# Altium PCB NBP5 Actel ProASIC Plus PQ208 Rev1.01.PcbDoc (part 2 of 2)
Units mm, origin at the board's own origin, x right, y up, seen from the top; angles counter-clockwise.
Board outline 69 x 80.99 mm, 2 copper layers (Top Layer, Bottom Layer); 65 components, 193 nets, 558 pads, 171 vias.
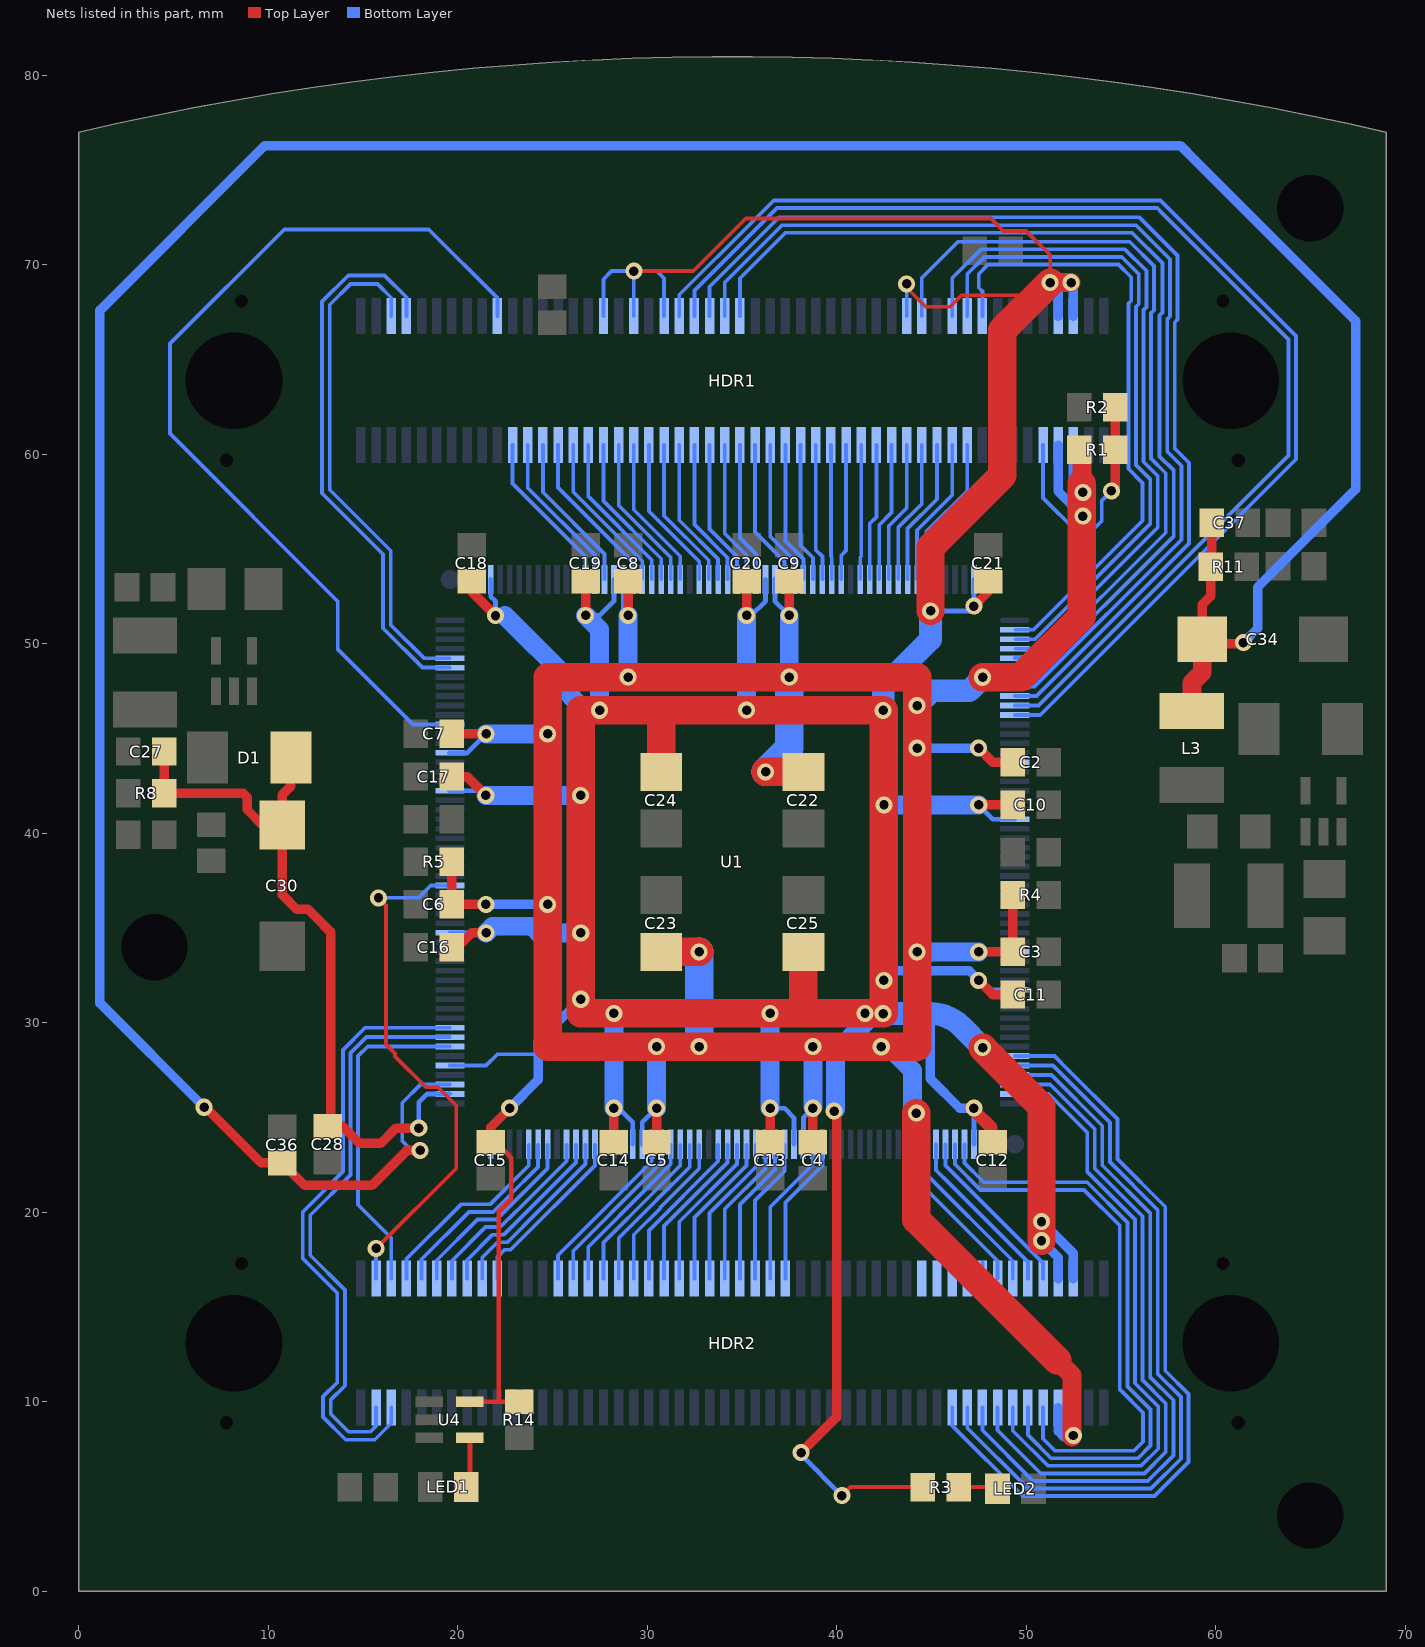
[diagram p2: the nets of this part, all layers, seen from the top]

## Via types
v1: diameter 0.9, hole 0.5, Top Layer to Bottom Layer, tented bottom, 171 vias

## Nets (pads, with @x,y where several pads share a name; then routed paths per layer and width w, separated by ;. In a path a pad name is that pad's centre, name@x,y a point inside that pad or via, vN(x,y) a via of type N, cw(c..) or ccw(c..) an arc to the next point about the centre after c; other vN are vias at no path point) (continued)
NetLED1_2: LED1.2 U4.4 | length 2.7
  Top Layer w0.25: LED1.2@20.457,5.512 20.65,5.705 U4.4@20.65,8.1
NetLED2_1: LED2.1 R3.2 | length 2.1
  Top Layer w0.2: R3.2@46.45,5.503 48.398,5.503 LED2.1@48.492,5.408
NEXUS_TCK: HDR1.82 U1.3 | length 35.2
  Bottom Layer w0.2: HDR1.82@46.9,67.3 46.9,69.525 47.8,70.425 55.05,70.425 55.95,69.525 55.95,67.947 55.8,67.797 55.8,59.45 56.55,58.7 56.55,56.325 50.475,50.25 U1.3@49.425,50.25
NEXUS_TDI: HDR1.84 U1.2 | length 34.1
  Bottom Layer w0.2: HDR1.84@47.7,68.2 HDR1.84@47.7,67.3 47.7,68.6 47.5,68.8 47.5,69.525 48,70.025 54.875,70.025 55.55,69.35 55.55,68.113 55.4,67.963 55.4,59.25 56.15,58.5 56.15,56.5 50.4,50.75 U1.2@49.425,50.75
NEXUS_TDO: HDR1.76 U1.5 | length 40.8
  Bottom Layer w0.2: HDR1.76@44.5,67.3 44.5,69.325 46.4,71.225 55.475,71.225 56.75,69.95 56.75,67.616 56.6,67.466 56.6,59.781 57.371,59.01 57.371,55.871 50.751,49.251 U1.5@49.4,49.251
NEXUS_TMS: HDR1.80 U1.4 | length 37.4
  Bottom Layer w0.2: HDR1.80@46.1,67.3 46.1,69.3 47.625,70.825 55.225,70.825 56.35,69.7 56.35,67.781 56.2,67.631 56.2,59.616 56.95,58.866 56.95,56.15 50.55,49.75 U1.4@49.425,49.75
RAM0_DATA0: HDR2.42 U1.79 | length 8.5
  Bottom Layer w0.2: HDR2.42@30.9,16.5 30.9,19.275 34.25,22.625 U1.79@34.25,23.575
RAM0_DATA1: HDR2.40 U1.80 | length 8.6
  Bottom Layer w0.2: HDR2.40@30.1,16.5 30.1,19.05 33.75,22.7 U1.80@33.75,23.575
RAM0_DATA2: HDR2.38 U1.82 | length 8.5
  Bottom Layer w0.2: HDR2.38@29.3,16.5 29.3,18.816 30.7,20.216 30.7,20.275 32.75,22.325 U1.82@32.75,23.575
RAM0_DATA3: HDR2.36 U1.83 | length 8.6
  Bottom Layer w0.2: HDR2.36@28.5,16.5 28.5,18.641 30.525,20.666 30.525,20.675 32.25,22.4 U1.83@32.25,23.575
RAM0_DATA4: HDR2.34 U1.84 | length 8.8
  Bottom Layer w0.2: HDR2.34@27.7,16.5 27.7,18.416 30.35,21.066 30.35,21.075 31.75,22.475 U1.84@31.75,23.575
RAM0_DATA5: HDR2.32 U1.85 | length 8.9
  Bottom Layer w0.2: HDR2.32@26.9,16.5 26.9,18.191 30.175,21.466 30.175,21.475 31.25,22.55 U1.85@31.25,23.575
RAM0_DATA6: HDR2.30 U1.86 | length 9
  Bottom Layer w0.2: HDR2.30@26.1,16.5 26.1,17.966 30,21.866 30,21.875 30.75,22.625 U1.86@30.75,23.575
RAM0_DATA7: HDR2.28 U1.87 | length 9.1
  Bottom Layer w0.2: HDR2.28@25.3,16.5 25.3,17.741 29.825,22.266 29.825,22.275 30.25,22.7 U1.87@30.25,23.575
RAM0_OE: HDR1.41 U1.180 | length 8
  Bottom Layer w0.2: HDR1.41@30.9,60.5 30.9,56.766 33.25,54.416 U1.180@33.25,53.425
RAM0_WE: HDR1.79 U1.202 | length 7.8
  Bottom Layer w0.2: U1.202@44.25,53.425 44.25,56 46.1,57.85 HDR1.79@46.1,60.5
RAM1_DATA0: HDR1.45 U1.182 | length 7.8
  Bottom Layer w0.2: HDR1.45@32.5,60.5 32.5,56.297 34.25,54.547 U1.182@34.25,53.425
RAM1_DATA1: HDR1.49 U1.184 | length 7.6
  Bottom Layer w0.2: HDR1.49@34.1,60.5 34.1,55.828 35.25,54.678 U1.184@35.25,53.425
RAM1_DATA2: HDR1.53 U1.188 | length 7.7
  Bottom Layer w0.2: HDR1.53@35.7,60.5 35.7,55.9 37.25,54.35 U1.188@37.25,53.425
RAM1_DATA3: HDR1.57 U1.190 | length 7.5
  Bottom Layer w0.2: HDR1.57@37.3,60.5 37.3,55.431 38.25,54.481 U1.190@38.25,53.425
RAM1_DATA4: HDR1.55 U1.189 | length 7.6
  Bottom Layer w0.2: HDR1.55@36.5,60.5 36.5,55.666 37.75,54.416 U1.189@37.75,53.425
RAM1_DATA5: HDR1.51 U1.185 | length 7.4
  Bottom Layer w0.2: HDR1.51@34.9,60.5 34.9,55.594 35.75,54.744 U1.185@35.75,53.425
RAM1_DATA6: HDR1.47 U1.183 | length 7.7
  Bottom Layer w0.2: HDR1.47@33.3,60.5 33.3,56.063 34.75,54.613 U1.183@34.75,53.425
RAM1_DATA7: HDR1.43 U1.181 | length 7.9
  Bottom Layer w0.2: HDR1.43@31.7,60.5 31.7,56.531 33.75,54.481 U1.181@33.75,53.425
RAM1_OE: HDR1.39 U1.179 | length 8.2
  Bottom Layer w0.2: HDR1.39@30.1,60.5 30.1,57 32.75,54.35 U1.179@32.75,53.425
RAM1_WE: HDR1.61 U1.192 | length 7.2
  Bottom Layer w0.2: HDR1.61@38.9,60.5 38.9,54.963 39.25,54.613 U1.192@39.25,53.425
RAM_ADDR0: HDR1.21 U1.167 | length 8.7
  Bottom Layer w0.2: HDR1.21@22.9,60.5 22.9,58.472 26.75,54.622 U1.167@26.75,53.425
RAM_ADDR1: HDR1.25 U1.169 | length 8.4
  Bottom Layer w0.2: HDR1.25@24.5,60.5 24.5,58.003 27.75,54.753 U1.169@27.75,53.425
RAM_ADDR2: HDR1.29 U1.173 | length 8.6
  Bottom Layer w0.2: HDR1.29@26.1,60.5 26.1,58.016 29.75,54.366 U1.173@29.75,53.425
RAM_ADDR3: HDR1.33 U1.175 | length 8.3
  Bottom Layer w0.2: HDR1.33@27.7,60.5 27.7,57.547 30.75,54.497 U1.175@30.75,53.425
RAM_ADDR4: HDR1.65 U1.194 | length 7.2
  Bottom Layer w0.2: U1.194@40.25,53.425 40.25,54.675 40.5,54.925 HDR1.65@40.5,60.5
RAM_ADDR5: HDR1.69 U1.197 | length 7.2
  Bottom Layer w0.2: U1.197@41.75,53.425 41.75,56.35 42.1,56.7 HDR1.69@42.1,60.5
RAM_ADDR6: HDR1.73 U1.199 | length 7.5
  Bottom Layer w0.2: U1.199@42.75,53.425 42.75,56.219 43.7,57.169 HDR1.73@43.7,60.5
RAM_ADDR7: HDR1.77 U1.201 | length 7.7
  Bottom Layer w0.2: U1.201@43.75,53.425 43.75,56.087 45.3,57.637 HDR1.77@45.3,60.5
RAM_ADDR8: HDR1.75 U1.200 | length 7.6
  Bottom Layer w0.2: U1.200@43.25,53.425 43.25,56.153 44.5,57.403 HDR1.75@44.5,60.5
RAM_ADDR9: HDR1.71 U1.198 | length 7.3
  Bottom Layer w0.2: U1.198@42.25,53.425 42.25,56.284 42.9,56.934 HDR1.71@42.9,60.5
RAM_ADDR10: HDR1.67 U1.196 | length 7.1
  Bottom Layer w0.2: U1.196@41.25,53.425 41.25,54.575 41.3,54.625 HDR1.67@41.3,60.5
RAM_ADDR11: HDR1.63 U1.193 | length 7.1
  Bottom Layer w0.2: HDR1.63@39.7,60.5 39.7,54.625 39.75,54.575 U1.193@39.75,53.425
RAM_ADDR12: HDR1.59 U1.191 | length 7.3
  Bottom Layer w0.2: HDR1.59@38.1,60.5 38.1,55.197 38.75,54.547 U1.191@38.75,53.425
RAM_ADDR13: HDR1.35 U1.176 | length 8.2
  Bottom Layer w0.2: HDR1.35@28.5,60.5 28.5,57.313 31.25,54.563 U1.176@31.25,53.425
RAM_ADDR14: HDR1.31 U1.174 | length 8.5
  Bottom Layer w0.2: HDR1.31@26.9,60.5 26.9,57.781 30.25,54.431 U1.174@30.25,53.425
RAM_ADDR15: HDR1.27 U1.172 | length 8.7
  Bottom Layer w0.2: HDR1.27@25.3,60.5 25.3,58.25 29.25,54.3 U1.172@29.25,53.425
RAM_ADDR16: HDR1.23 U1.168 | length 8.5
  Bottom Layer w0.2: HDR1.23@23.7,60.5 23.7,58.238 27.25,54.688 U1.168@27.25,53.425
RAM_CS: HDR1.37 U1.177 | length 8.1
  Bottom Layer w0.2: HDR1.37@29.3,60.5 29.3,57.078 31.75,54.628 U1.177@31.75,53.425
RED0: HDR1.6 U1.152 | length 27
  Bottom Layer w0.2: HDR1.6@16.5,67.3 16.5,68.275 15.775,69 14.35,69 13.25,67.9 13.25,58.134 16.469,54.915 16.469,51.006 18.225,49.25 U1.152@19.575,49.25
RED1: HDR1.8 U1.151 | length 29.4
  Bottom Layer w0.2: HDR1.8@17.3,67.3 17.3,68.3 16.15,69.45 14.225,69.45 12.85,68.075 12.85,57.95 16.069,54.731 16.069,50.831 18.15,48.75 U1.151@19.575,48.75
REF_CLK: HDR2.4 U1.128 | length 27.9
  Top Layer w0.2: v1(15.7,18.1) 19.925,22.325 19.925,25.634 18.959,26.6 18.325,26.6 16.7,28.225 16.7,28.391 16.225,28.866 16.225,36.2 v1(15.825,36.6)
  Bottom Layer w0.2: HDR2.4@15.7,16.5 v1(15.7,18.1) ; v1(15.825,36.6) 17.934,36.6 18.584,37.25 U1.128@19.575,37.25
SCL: HDR2.5 U1.113 | length 32.7
  Bottom Layer w0.2: HDR2.5@16.5,9.7 16.5,8.875 15.625,8 14.1,8 12.9,9.2 12.9,10.275 13.65,11.025 13.65,15.744 11.825,17.569 11.825,20.025 13.95,22.15 13.95,28.577 15.123,29.75 U1.113@19.575,29.75
SDA: HDR2.3 U1.112 | length 30.4
  Bottom Layer w0.2: HDR2.3@15.7,9.7 15.7,8.725 15.402,8.427 14.248,8.427 13.3,9.375 13.3,10.1 14.05,10.85 14.05,15.91 12.225,17.735 12.225,19.85 14.35,21.975 14.35,28.412 15.188,29.25 U1.112@19.575,29.25
SP0: HDR2.79 U1.47 | length 42.2
  Bottom Layer w0.2: HDR2.79@46.1,9.7 46.1,8.75 49.825,5.025 56.775,5.025 58.575,6.825 58.575,10.419 57.35,11.644 57.35,20.294 54.825,22.819 54.825,24.925 52.246,27.504 51.499,28.251 U1.47@49.4,28.251
SP1: HDR2.81 U1.48 | length 39.9
  Bottom Layer w0.2: HDR2.81@46.9,9.7 46.9,8.625 50.1,5.425 56.6,5.425 58.175,7 58.175,10.253 56.95,11.478 56.95,20.128 54.425,22.653 54.425,24.75 51.424,27.751 U1.48@49.4,27.751
SP2: HDR2.83 U1.49 | length 37.6
  Bottom Layer w0.2: HDR2.83@47.7,9.7 47.7,8.5 50.375,5.825 56.425,5.825 57.775,7.175 57.775,10.088 56.55,11.313 56.55,19.962 54.025,22.487 54.025,24.575 51.349,27.251 U1.49@49.4,27.251
SP3: HDR2.85 U1.50 | length 35.3
  Bottom Layer w0.2: HDR2.85@48.5,9.7 48.5,8.5 50.775,6.225 56.25,6.225 57.375,7.35 57.375,9.922 56.15,11.147 56.15,19.797 53.625,22.322 53.625,24.4 51.274,26.751 U1.50@49.4,26.751
SP4: HDR2.87 U1.51 | length 33
  Bottom Layer w0.2: HDR2.87@49.3,9.7 49.3,8.475 51.15,6.625 56.075,6.625 56.975,7.525 56.975,9.756 55.75,10.981 55.75,19.631 53.225,22.156 53.225,24.225 51.199,26.251 U1.51@49.4,26.251
SP5: HDR2.89 U1.54 | length 31.9
  Bottom Layer w0.2: U1.54@46.75,23.601 46.75,22.607 47.769,21.588 53.227,21.588 55.35,19.465 55.35,10.816 56.575,9.591 56.575,7.7 55.9,7.025 51.325,7.025 50.1,8.25 HDR2.89@50.1,9.7
SP6: HDR2.91 U1.55 | length 30.4
  Bottom Layer w0.2: U1.55@46.25,23.601 46.25,22.541 47.603,21.188 53.062,21.188 54.95,19.3 54.95,10.65 56.175,9.425 56.175,7.9 55.7,7.425 51.525,7.425 50.9,8.05 HDR2.91@50.9,9.7
SP7: HDR2.92 U1.56 | length 9.2
  Bottom Layer w0.2: U1.56@45.75,23.601 45.75,22.475 50.9,17.325 HDR2.92@50.9,16.5
SP8: HDR2.90 U1.57 | length 9.4
  Bottom Layer w0.2: U1.57@45.25,23.601 45.25,22.225 45.985,21.49 ; 45.75,21.725 45.985,21.49 ; HDR2.90@50.1,16.5 50.1,17.375 45.985,21.49
SP9: HDR2.88 U1.58 | length 9
  Bottom Layer w0.2: U1.58@44.75,23.601 44.75,22 49.3,17.45 HDR2.88@49.3,16.5
SP10: HDR2.86 U1.59 | length 8.9
  Bottom Layer w0.2: U1.59@44.25,23.601 44.25,21.7 48.5,17.45 HDR2.86@48.5,16.5
SP11: HDR2.84 | length 0.8
  Bottom Layer w0.2: HDR2.84@47.7,16.5 HDR2.84@47.7,17.341
SP12: HDR2.82
SP13: HDR2.80
SP14: HDR2.78
SP15: HDR2.76
SPI_CLK: HDR1.46 U1.10 | length 63.4
  Bottom Layer w0.2: HDR1.46@32.5,67.3 32.5,68.65 36.277,72.427 36.85,73 56.925,73 57.173,72.752 63.85,66.075 63.85,59.95 50.651,46.751 U1.10@49.4,46.751
SPI_DIN: HDR1.44 U1.11 | length 66.3
  Bottom Layer w0.2: HDR1.44@31.7,67.3 31.7,68.425 35.6,72.325 ; 35.134,71.859 35.143,71.859 36.684,73.4 57.1,73.4 64.25,66.25 64.25,59.75 50.751,46.251 U1.11@49.4,46.251
SPI_DOUT: HDR1.50 U1.8 | length 54.5
  Bottom Layer w0.2: HDR1.50@34.1,67.3 34.1,69.075 36.815,71.79 37.125,72.1 55.8,72.1 57.6,70.3 57.6,67.291 57.459,67.15 ; U1.8@49.4,47.751 50.451,47.751 58.2,55.5 58.2,59.4 57.45,60.15 57.45,67.15 57.455,67.155
SPI_MODE: HDR1.52 U1.7 | length 52.2
  Bottom Layer w0.2: HDR1.52@34.9,67.3 34.9,69.3 37.3,71.7 55.6,71.7 57.2,70.1 57.2,67.5 57.05,67.35 57.05,59.897 57.8,59.147 57.8,55.7 50.351,48.251 U1.7@49.4,48.251
SPI_SEL: HDR1.48 U1.9 | length 56.7
  Bottom Layer w0.2: HDR1.48@33.3,67.3 33.3,68.85 36.677,72.227 36.964,72.514 55.986,72.514 58,70.5 58,67.125 57.85,66.975 57.85,60.316 58.6,59.566 58.6,55.3 50.551,47.251 U1.9@49.4,47.251
SW0: HDR2.44 U1.78 | length 8.3
  Bottom Layer w0.2: HDR2.44@31.7,16.5 31.7,19.509 34.75,22.559 U1.78@34.75,23.575
SW1: HDR2.46 U1.77 | length 8.2
  Bottom Layer w0.2: HDR2.46@32.5,16.5 32.5,19.725 35.25,22.475 U1.77@35.25,23.575
SW2: HDR2.48 U1.76 | length 8.1
  Bottom Layer w0.2: HDR2.48@33.3,16.5 33.3,19.959 35.75,22.409 U1.76@35.75,23.575
SW3: HDR2.50 U1.75 | length 8
  Bottom Layer w0.2: HDR2.50@34.1,16.5 34.1,20.175 36.25,22.325 U1.75@36.25,23.575
SW4: HDR2.52 U1.74 | length 7.8
  Bottom Layer w0.2: HDR2.52@34.9,16.5 34.9,20.409 36.75,22.259 U1.74@36.75,23.575
SW5: HDR2.54 U1.73 | length 7.7
  Bottom Layer w0.2: HDR2.54@35.7,16.5 35.7,20.625 37.25,22.175 U1.73@37.25,23.575
SW6: HDR2.56 U1.70 | length 8
  Bottom Layer w0.2: HDR2.56@36.5,16.5 36.5,20.291 38.75,22.54 U1.70@38.75,23.601
SW7: HDR2.58 U1.69 | length 7.9
  Bottom Layer w0.2: HDR2.58@37.3,16.5 37.3,20.525 39.25,22.475 U1.69@39.25,23.575
SWC0: HDR2.18 U1.94 | length 9.6
  Bottom Layer w0.2: HDR2.18@21.3,16.5 21.3,17.625 22.1,18.425 22.634,18.425 23.475,19.266 23.475,19.275 26.75,22.55 U1.94@26.75,23.575
SWC1: HDR2.16 U1.95 | length 9.8
  Bottom Layer w0.2: HDR2.16@20.5,16.5 20.5,17.475 21.85,18.825 22.4,18.825 22.42,18.845 ; 22.441,18.825 23.525,19.909 23.534,19.909 26.25,22.625 U1.95@26.25,23.575
SWC2: HDR2.14 U1.96 | length 10
  Bottom Layer w0.2: HDR2.14@19.7,16.5 19.7,17.45 21.475,19.225 22.25,19.225 23.1,20.075 23.125,20.075 25.75,22.7 U1.96@25.75,23.575
SWC3: HDR2.6 U1.111 | length 17.5
  Bottom Layer w0.2: HDR2.6@16.5,16.5 16.5,18.65 14.75,20.4 14.75,28.246 15.254,28.75 U1.111@19.575,28.75
SWR0: HDR2.20 U1.93 | length 9.4
  Bottom Layer w0.2: HDR2.20@22.1,16.5 22.1,17.65 22.475,18.025 22.8,18.025 27.25,22.475 U1.93@27.25,23.575
SWR1: HDR2.12 U1.98 | length 10.1
  Bottom Layer w0.2: HDR2.12@18.9,16.5 18.9,17.475 21.05,19.625 22.05,19.625 22.9,20.475 24.75,22.325 U1.98@24.75,23.575
SWR2: HDR2.10 U1.99 | length 10.4
  Bottom Layer w0.2: HDR2.10@18.1,16.5 18.1,17.525 20.6,20.025 21.884,20.025 22.725,20.866 22.725,20.875 24.25,22.4 U1.99@24.25,23.575
SWR3: HDR2.8 U1.100 | length 10.6
  Bottom Layer w0.2: HDR2.8@17.3,16.5 17.3,17.55 20.175,20.425 21.709,20.425 22.55,21.266 22.55,21.275 23.75,22.475 U1.100@23.75,23.575
TEST: HDR1.81 U1.203 | length 8
  Bottom Layer w0.2: U1.203@44.75,53.425 44.75,55.934 46.9,58.084 HDR1.81@46.9,60.5
VCC: C10.1 C11.2 C12.2 C13.2 C14.2 C15.2 C16.2 C17.2 C18.2 C19.2 C20.2 C21.2 C24.1 C25.1 HDR1.34 HDR1.38 HDR1.42 HDR1.74 HDR1.94 HDR1.96 HDR2.94 HDR2.96 R3.1 R14.2 U1.22 U1.40 U1.53 U1.72 U1.89 U1.104 U1.109 U1.123 U1.138 U1.157 U1.170 U1.186 U1.208 U4.5 | length 341.4
  Top Layer w0.2: v1(29.3,69.675) 32.434,69.675 35.209,72.45 48.15,72.45 48.8,71.8 50,71.8 51.275,70.525 v1(51.275,69.075) ; v1(40.275,5.05) 40.728,5.503 R3.1@44.55,5.503 ; v1@43.7,68.8 44.7,67.8 46,67.8 46.6,68.4 50.1,68.4 ; v1(52.375,69.075) v1@52.5,69.2
  Top Layer w0.25: U4.5@20.65,10 R14.2@23.247,10 ; C15.2@21.747,23.7 22,23.7 22.825,22.875 22.825,20.725 22.172,20.072 22.172,10.078 22.095,10
  Top Layer w0.5: C16.2@19.7,34.003 20.003,34.003 20.75,34.75 v1(21.5,34.75) ; C17.2@19.7,43.003 20.497,43.003 v1(21.497,42.003) ; C18.2@20.753,53.3 20.753,52.747 v1(22,51.5) ; C15.2@21.747,23.7 21.747,24.497 v1(22.75,25.5) ; v1(26.753,51.503) C19.2@26.753,53.3 ; C14.2@28.247,23.7 v1(28.247,25.497) ; v1(35.253,51.503) C20.2@35.253,53.3 ; C13.2@36.497,23.7 v1(36.497,25.497) ; v1(38.125,7.325) 40,9.2 40,25.225 v1(39.875,25.35) ; v1@47,25.5 C12.2@48.247,24.253 ; v1(47.25,25.5) 48.247,24.503 C12.2@48.247,23.7 ; v1(47.25,52) 48.003,52.753 C21.2@48.003,53.3 ; v1(47.5,32.25) 48.253,31.497 C11.2@49.3,31.497 ; v1(47.503,41.503) C10.1@49.3,41.503
  Top Layer w1: v1(51.275,69.075) v1(52.375,69.075)
  Top Layer w1.5: C24.1@30.75,43.25 30.75,46.5 ; 38.25,30.5 C25.1@38.25,33.75 ; v1(44.958,51.742) 44.958,55.098 48.75,58.89 48.75,66 48.75,66.55 v1(51.275,69.075) ; v1(47.708,28.692) 50.815,25.589 v1(50.815,18.502) ; 26.5,30.5 42.5,30.5 42.5,46.5 26.5,46.5 26.5,30.5
  Bottom Layer w0.2: U1.109@19.6,27.751 21.501,27.751 22.1,28.35 24.25,28.35 ; HDR1.34@27.7,67.3 27.7,69.25 28.125,69.675 30.525,69.675 30.9,69.3 HDR1.42@30.9,67.3 ; HDR1.38@29.3,67.3 v1(29.3,69.675) ; HDR1.74@43.7,67.3 v1(43.7,69)
  Bottom Layer w0.25: U1.138@19.575,42.25 v1@21.25,42.25 ; U1.123@19.6,34.75 v1(21.5,34.75) ; U1.104@21.75,23.601 21.75,24.5 v1(22.75,25.5) ; U1.157@21.75,53.401 21.75,52.5 22,52.25 v1(22,51.5) ; v1(26.753,51.503) 27.503,51.503 28.25,52.25 U1.170@28.25,53.401 ; v1(28.247,25.497) 28.503,25.497 29.25,24.75 U1.89@29.25,23.601 ; v1(35.253,51.503) 35.503,51.503 36.25,52.25 U1.186@36.25,53.401 ; v1(36.497,25.497) 37.253,25.497 37.75,25 U1.72@37.75,23.601 ; v1(38.125,7.325) 38.125,7.2 v1(40.275,5.05) ; v1(44.958,51.742) 46.992,51.742 v1(47.25,52) U1.208@47.25,53.401 ; U1.53@47.25,23.601 v1(47.25,25.5) ; v1(47.5,32.25) 48,31.75 U1.40@49.4,31.75 ; v1(47.503,41.503) 48.255,40.75 U1.22@49.4,40.75
  Bottom Layer w0.5: v1(22,51.5) 22.5,51.5 ; v1@22.788,25.538 24.25,27 24.25,29 v1(26.5,31.25) ; v1(39.875,25.35) v1@39.875,25.422 ; v1(42.5,32.25) 43,32.75 47,32.75 v1(47.5,32.25) ; 44.955,30.492 44.955,27.045 46.5,25.5 v1(47.25,25.5) ; v1(50.815,18.502) 51.7,17.617 HDR2.94@51.7,16.5 ; v1(50.815,19.518) 52.5,17.833 HDR2.96@52.5,16.5 ; v1(51.275,69.075) 51.7,68.65 HDR1.94@51.7,67.3 ; v1(52.375,69.075) 52.5,68.95 HDR1.96@52.5,67.3
  Bottom Layer w1: v1(21.497,42.003) v1(26.497,42.003) ; v1(21.5,34.75) 21.85,35.1 23.925,35.1 24.275,34.75 v1(26.5,34.75) ; 22.5,51.5 25.95,48.05 25.95,47.275 26.725,46.5 v1(27.5,46.5) 27.5,50.755 v1(26.753,51.503) ; v1(28.247,25.497) v1(28.247,30.497) ; v1(35.253,46.503) v1(35.253,51.503) ; v1(36.497,25.497) v1(36.497,30.497) ; v1@39.947,25.422 39.947,28.447 41.5,30 v1(41.5,30.5) v1@42.45,30.5 ; v1(42.503,41.503) v1(47.503,41.503)
  Bottom Layer w1.2: v1@42.458,30.498 44.955,30.492 cw(c44.955,28.192) 46.582,29.819 v1(47.708,28.692) ; v1(42.458,46.492) 42.458,47.733 44.958,50.233 v1(44.958,51.742)
  other v1: 42.458,30.492
VCCINT: C2.2 C3.2 C4.2 C5.2 C6.2 C7.2 C8.2 C9.2 C22.1 C23.1 HDR1.93 HDR1.95 HDR2.93 HDR2.95 R1.1 R4.1 R5.1 U1.16 U1.36 U1.71 U1.88 U1.126 U1.142 U1.171 U1.187 | length 210.2
  Top Layer w0.5: R5.1@19.7,38.497 C6.2@19.7,36.253 v1(21.497,36.253) ; C7.2@19.7,45.253 19.702,45.25 v1(21.5,45.25) ; v1(29.003,51.503) C8.2@29.003,53.3 ; C5.2@30.497,23.7 v1(30.497,25.497) ; v1(37.503,51.503) C9.2@37.503,53.3 ; C4.2@38.747,23.7 v1(38.747,25.497) ; v1(47.5,44.5) 48.253,43.747 C2.2@49.3,43.747 ; v1(47.503,33.747) C3.2@49.3,33.747 R4.1@49.3,36.753
  Top Layer w1: 51.638,12.193 52.425,11.406 v1@52.425,8.15 ; 52.95,58.45 R1.1@52.95,59.85
  Top Layer w1.5: C23.1@30.75,33.75 v1(32.75,33.75) ; v1(36.25,43.25) C22.1@38.25,43.25 ; v1(44.208,25.242) 44.208,19.623 51.638,12.193 ; v1(47.708,48.242) 49.72,48.242 52.95,51.473 52.95,58.45 ; 24.75,28.75 44.25,28.75 44.25,48.25 24.75,48.25 24.75,28.75
  Bottom Layer w0.25: U1.126@19.575,36.25 v1@21.495,36.25 ; U1.142@19.575,44.25 20.5,44.25 v1(21.5,45.25) ; U1.171@28.75,53.425 28.75,51.755 v1(29.003,51.503) ; U1.88@29.75,23.575 29.75,24.75 v1(30.497,25.497) ; U1.187@36.75,53.425 36.75,52.255 v1(37.503,51.503) ; U1.71@38.25,23.575 38.25,25 v1(38.747,25.497) ; v1(47.5,44.5) 48.25,43.75 U1.16@49.425,43.75 ; v1@47.505,33.75 U1.36@49.425,33.75
  Bottom Layer w0.5: v1(21.497,36.253) v1(24.747,36.253) ; v1(38.747,25.497) v1@38.747,25.576 ; v1(44.25,44.5) v1(47.5,44.5) ; HDR2.93@51.7,9.7 51.7,8.45 52,8.15 52.425,8.15 v1(52.5,8.225) HDR2.95@52.5,9.7 ; HDR1.93@51.7,60.5 51.7,58.05 v1(53,56.75) ; HDR1.95@52.5,60.5 52.5,58.5 v1(53,58)
  Bottom Layer w1: v1(21.5,45.25) v1(24.75,45.25) ; v1(29.003,48.253) v1(29.003,51.503) ; v1(30.497,25.497) v1(30.497,28.747) ; v1(37.503,48.253) v1(37.503,51.503) ; v1@38.747,25.576 v1(38.747,28.747) ; v1(42.358,28.742) 42.758,28.742 44,27.5 44,25.45 v1(44.208,25.242) ; v1(44.253,33.747) v1(47.503,33.747)
  Bottom Layer w1.2: v1(44.25,46.75) 45.025,47.525 47,47.525 v1(47.708,48.242)
  Bottom Layer w1.5: v1(32.75,28.75) v1(32.75,33.75) ; v1(36.25,43.25) 37.503,44.503 v1(37.503,48.253)
VDRIVE: HDR1.20 U1.145 | length 49.6
  Bottom Layer w0.2: U1.145@19.575,45.75 17.65,45.75 13.669,49.731 13.669,52.256 4.825,61.1 4.825,65.85 10.85,71.875 18.475,71.875 22.1,68.25 HDR1.20@22.1,67.3
VPN: C34.2 C36.1 C37.1 L3.2 R11.1 U1.107 | length 169.9
  Top Layer w0.5: v1(6.625,25.55) 6.7,25.55 9.641,22.609 C36.1@10.747,22.609 11.932,21.425 15.475,21.425 17.325,23.275 v1(18.025,23.275) ; R11.1@59.75,54.078 59.75,52.525 59.3,52.075 59.3,50 61.4,50 v1(61.475,50.075) ; R11.1@59.8,54.128 C37.1@59.8,56.403
  Top Layer w1: L3.2@58.75,46.45 58.75,47.95 59.3,48.5 C34.2@59.3,50
  Bottom Layer w0.2: v1(18.025,23.275) 17.575,23.275 17.075,23.775 17.075,25.784 18.041,26.75 U1.107@19.575,26.75
  Bottom Layer w0.5: v1(6.625,25.55) 1.125,31.05 1.125,67.6 9.825,76.3 58.15,76.3 58.92,75.53 67.4,67.05 67.4,58.175 66.478,57.253 62.225,53 62.225,50.825 v1(61.475,50.075)
VPP: C27.1 C28.1 C30.1 D1.2 R8.1 U1.106 | length 38.5
  Top Layer w0.5: C27.1@4.525,44.322 R8.1@4.525,42.122 8.678,42.122 8.9,41.9 8.9,41.25 C30.1@9.7,40.45 ; D1.2@11.375,43.825 D1.2@11.2,44 11.2,42.5 10.75,42.05 10.75,36.75 11.5,36 12.1,36 12.5,35.6 13.3,34.8 13.3,24.698 C28.1@13.153,24.55 13.925,24.55 14.825,23.65 15.95,23.65 16.75,24.45 v1(17.95,24.45)
  Bottom Layer w0.25: v1(17.95,24.45) 17.95,25.8 18.4,26.25 U1.106@19.575,26.25
VREF: HDR1.91 R1.2 R2.1 | length 13.2
  Top Layer w0.5: v1(54.5,58.075) 54.588,58.162 54.7,58.275 R1.2@54.7,60.253 R2.1@54.7,62.497
  Bottom Layer w0.2: HDR1.91@50.9,60.5 50.9,57.7 52.7,55.9 53.4,55.9 54,56.5 54,57.575 v1(54.5,58.075)
pads on no net: HDR1.MH1 HDR1.MH2 HDR1.MH3 HDR1.MH4 HDR1.MH5 HDR1.MH6 HDR2.MH1 HDR2.MH2 HDR2.MH3 HDR2.MH4 HDR2.MH5 HDR2.MH6 U1.6 U1.26 U1.28 U1.129 U1.132 U1.FID1 U1.FID2 U4.1

## Polygon pours and split planes (outlines as drawn)
GND on Top Layer "Top Layer-GND" (solid, remove dead copper, pour order 1000): 0,0 0,81 69,81 69,0
GND on Bottom Layer "Bottom Layer-GND" (solid, remove dead copper, pour order 1001): 0,0 0,81 69,81 69,0

## Keep-outs
Keep-Out Layer:
  the board outline again, w0.8

## Silkscreen, mask and mechanical layers (free items; w line width, h text height)
Top Overlay:
  circle w0.127: c4,34 r2.5
  circle w0.127: c65,4 r2.5
  circle w0.127: c65,73 r2.5
  lines w0.127: 0,1.5 1.5,1.5 1.5,0 ; 0,22.3 1.5,22.3 1.5,23.4 0,23.4 ; 0.001,53.6 1.501,53.6 1.501,54.7 0.001,54.7 ; 0,75.5 1.5,75.5 1.5,77.3 ; 15.7,79.8 15.7,78.1 17,78.1 17,79.9 ; 49.7,80.2 49.7,78.7 51,78.7 51,80.1 ; 52.1,41.8 53.1,41.8 ; 67.5,0 67.5,1.5 69,1.5 ; 67.5,77.3 67.5,75.5 69,75.5 ; 68.999,22.3 67.5,22.3 67.5,23.4 69,23.4 ; 69,53.6 67.501,53.6 67.501,54.7 69.001,54.7
Bottom Overlay:
  drawing of 853 lines, arcs and shapes, not listed
  text "REV 1.01" at 47.6,76.5 h1.3
  text "NBP5" at 54.5,76.5 h1.3
  text "1" at 13.97,58.42 h1
  text "1" at 14.224,7.62 h1
PCB Boundary:
  the board outline again, w0.25
  text "PCB boundary coincides with centre-line of tracks and arc" at 0,-12 h0.75
Gerber ID:
  text ".Layer_Name" at 0,-6 h0.75
Printout ID:
  text ".Printout_Name" at 0,-10 h0.75
Design Information:
  drawing of 713 lines, arcs and shapes, not listed
  text "NBP5 REV 1.01" at 317.627,202.041 h1.27
  text "DESIGN INFORMATION" at 261.62,201.914 h1.52
  text "BOARD NAME:" at 299.212,201.914 h1.52
  text "BOARD TECHNOLOGY" at 261.62,199.374 h1.52
  text "BOARD SIZE (REFER ALSO PROFILING INFORMATION)" at 309.88,199.374 h1.27
  text "69.00mm" at 312.6,197.1 h1.52
  text "11.811" at 277.419,197.012 h1.52
  text "81.00mm" at 335.6,197 h1.52
  text "7.874" at 291.389,196.885 h1.52
  text "7.874" at 264.446,196.834 h1.52
  text "X" at 328.549,196.326 h1.78
  text "(MIN. TRACK/   PADS  /   CLEARANCE     IN 0.001'')" at 260.096,194.294 h1.27
  text "MINIMUM ANNULAR RING 0.05MM (0.002'') EXTERNAL PER IPC-2221 CLASS 3 LEVEL C AND IS THE" at 261.62,191.754 h1.27
  text "MANUFACTURING REGISTRATION ALLOWANCE" at 261.62,189.468 h1.27
  text "LAND SIZE CALCULATION MINIMUM - NOMINAL HOLE SIZE + 0.508MM (0.020'')" at 261.62,186.674 h1.27
  text "AS INSTRUCTED" at 347.65,182.28 h1.52
  text "X" at 299.263,182.153 h1.52
  text "CIRCUIT TYPE:" at 261.62,182.102 h1.52
  text "SS" at 284.48,182.102 h1.27
  text "DS" at 302.26,182.102 h1.27
  text "X" at 316.865,182.102 h1.52
  text "PTH" at 320.04,182.102 h1.27
  text "ML" at 330.962,182.102 h1.27
  text "No. OFF" at 337.82,182.102 h1.27
  text "FINGER CONNECTOR DIM PER:" at 261.62,179.054 h1.52
  text "AS SHOWN" at 337.82,179.054 h1.27
  text "No. OFF TOTAL" at 278.384,176.26 h1.52
  text "ONE SIDE" at 320.04,176.26 h1.27
  text "BOTH SIDES" at 337.82,176.006 h1.27
  text "VIAS:" at 261.62,173.339 h1.52
  text "NONE" at 273.05,173.339 h1.14
  text "X" at 281.432,173.339 h1.52
  text "FEED THRU'" at 284.48,173.339 h1.14
  text "X" at 299.212,173.339 h1.52
  text "TENTED (On BOTTOM side; via holes uncovered on TOP side)" at 302.26,173.339 h1.14
  text "UNIQUE DRILL" at 284.48,170.291 h1.14
  text "2 SIZE" at 302.26,170.291 h1.14
  text "BLIND LAYER SEQUENCE" at 320.04,170.291 h1.14
  text "Layer Stack Manager (Protel)" at 297.053,168.005 h1.27
  text "X" at 334.772,168.005 h1.52
  text "AS SHOWN" at 337.82,168.005 h1.27
  text "LAYER CONSTRUCTION PER:" at 261.62,167.878 h1.52
  text "Protel" at 342.646,165.338 h1.27
  text "(PFW)" at 352.933,165.211 h1.27
  text "ARTWORK:" at 261.62,165.084 h1.52
  text "MANUAL" at 284.48,165.084 h1.27
  text "DIGITISED" at 302.26,165.084 h1.27
  text "X" at 316.992,165.084 h1.52
  text "CAD" at 320.04,165.084 h1.27
  text "TYPE" at 330.962,165.084 h1.27
  text "ARTWORK/PATTERN MASTER LIST" at 261.62,160.385 h1.52
  text "DESCRIPTION" at 262.89,157.972 h1.27
  text "DRAWING No./CAD FILE REF." at 281.559,157.972 h1.27
  text "LAYER NAME" at 322.834,157.972 h1.27
  text "GERBER FILE REF" at 343.586,157.896 h1.27
  text "PCB FILE" at 261.366,155.432 h1.27
  text "BOCD_Actel_APA_NBP5_1_01" at 281.737,155.356 h1.27
  text "PcbDoc" at 312.979,155.356 h1.02
  text "Top Paste Mask" at 321.158,152.892 h1.02
  text "GTP" at 363.779,152.816 h1.27
  text "GERBER FILE" at 261.366,152.765 h1.27
  text "GTO" at 363.728,150.327 h1.27
  text "Top Overlay" at 321.158,150.301 h1.02
  text "GERBER FILE" at 261.366,150.225 h1.27
  text "Top Solder Mask" at 321.158,147.863 h1.02
  text "GTS" at 363.779,147.736 h1.27
  text "GERBER FILE" at 261.366,147.685 h1.27
  text "TOP LAYER" at 321.158,145.272 h1.02
  text "GTL" at 363.779,145.196 h1.27
  text "GERBER FILE" at 261.366,145.145 h1.27
  text "BOTTOMLAYER" at 321.158,142.732 h1.02
  text "GBL" at 363.779,142.656 h1.27
  text "GERBER FILE" at 261.366,142.605 h1.27
  text "Bottom Solder Mask" at 321.158,140.243 h1.02
  text "GBS" at 363.779,140.116 h1.27
  text "GERBER FILE" at 261.366,140.065 h1.27
  text "Bottom Overlay" at 321.158,137.652 h1.02
  text "GBO" at 363.779,137.576 h1.27
  text "GERBER FILE" at 261.366,137.525 h1.27
  text "Bottom Paste Mask" at 321.158,135.163 h1.02
  text "GBP" at 363.779,135.036 h1.27
  text "GERBER FILE" at 261.366,134.985 h1.27
  text "PCB Boundary" at 321.158,132.572 h1.02
  text "GM1" at 363.779,132.496 h1.27
  text "GERBER FILE" at 261.366,132.445 h1.27
  text "APERTURE LIST" at 261.366,130.032 h1.27
  text "APR" at 313.979,129.956 h1.27
  text "DRILL REPORT" at 261.366,127.492 h1.27
  text "DRR" at 313.979,127.416 h1.27
  text "EXCELLON DRILL" at 261.366,124.952 h1.27
  text "TXT" at 313.979,124.876 h1.27
  text "MATERIAL:" at 261.62,99.298 h1.52
  text "GLASS FIBRE EPOXY RESIN NEMA GRADE FR4 (MIL-S-13949H)" at 287.274,99.044 h1.27
  text "X" at 284.607,98.917 h1.52
  text "THICKNESS:" at 269.494,96.123 h1.27
  text "0.8mm" at 287.274,96.123 h1.27
  text "1.2mm" at 304.927,96.123 h1.27
  text "1.6mm" at 322.58,96.123 h1.27
  text "2.4mm" at 340.36,96.123 h1.27
  text "3.2mm" at 358.14,96.123 h1.27
  text "X" at 320.167,95.996 h1.52
  text "TOLERANCE:" at 269.367,93.075 h1.27
  text "IN A/W IPC-D-300G CLASS" at 287.02,93.075 h1.27
  text "3 LEVEL B" at 321.945,93.075 h1.27
  text "OTHER +/-" at 340.36,93.075 h1.27
  text "X" at 284.607,92.948 h1.52
  text "BOW & TWIST:" at 266.954,90.027 h1.27
  text "IN A/W IPC-D-300G CLASS" at 287.02,90.027 h1.27
  text "3 LEVEL B" at 321.945,90.027 h1.27
  text "AS SHOWN" at 340.487,89.9 h1.27
  text "X" at 284.607,89.773 h1.52
  text "COPPER THICKNESS (FINISHED)" at 269.367,86.725 h1.27
  text "OUTER:" at 274.193,84.439 h1.27
  text "18um" at 287.274,84.439 h1.27
  text "35um" at 314.325,84.439 h1.27
  text "70um" at 340.614,84.439 h1.27
  text "X" at 311.582,84.236 h1.52
  text "INNER SIGNAL:" at 265.811,81.391 h1.27
  text "18um" at 287.274,81.391 h1.27
  text "35um" at 314.325,81.391 h1.27
  text "70um" at 340.614,81.391 h1.27
  text "INNER PWR:" at 269.494,78.343 h1.27
  text "18um" at 287.274,78.343 h1.27
  text "35um" at 314.325,78.343 h1.27
  text "70um" at 340.614,78.343 h1.27
  text "STRUCTURE:" at 261.62,75.295 h1.52
  text "REFER" at 287.274,75.295 h1.27
  text "AS PER DRAWING No." at 287.147,72.12 h1.27
  text "AS SHOWN" at 340.487,72.12 h1.27
  text "X" at 337.947,71.993 h1.52
  text "DRILLING:" at 261.62,69.326 h1.52
  text "VIEWED FROM:" at 266.573,67.04 h1.27
  text "COMPONENT SIDE" at 287.274,67.04 h1.14
  text "SOLDER SIDE" at 314.071,67.04 h1.14
  text "X" at 284.607,66.786 h1.52
  text "REFERENCE:" at 268.859,63.992 h1.27
  text "AS SHOWN" at 287.147,63.865 h1.14
  text "PATTERN MASTER LIST" at 314.198,63.865 h1.14
  text "X" at 337.947,63.865 h1.52
  text "NC_DRILL FILES" at 340.487,63.865 h1.14
  text "X" at 284.607,63.738 h1.52
  text "PTH MINIMUM COPPER THICKNESS:" at 274.701,60.944 h1.27
  text "20um" at 314.325,60.944 h1.27
  text "X" at 311.658,60.817 h1.52
  text "OTHER" at 340.487,60.817 h1.27
  text "NPTH:" at 275.209,57.896 h1.27
  text "TENTED" at 287.147,57.769 h1.14
  text "X" at 311.658,57.769 h1.52
  text "PADS REMOVED" at 314.198,57.769 h1.14
  text "REMOVE PADS" at 340.487,57.769 h1.14
  text "X" at 284.607,57.642 h1.52
  text "2nd DRILL" at 287.147,54.721 h1.14
  text "BOTH" at 314.198,54.721 h1.14
  text "AS SHOWN" at 326.517,54.721 h1.14
  text "NONE" at 340.487,54.721 h1.14
  text "BOARD FINISH:" at 261.62,51.8 h1.52
  text "X" at 284.607,51.673 h1.52
  text "ETCHING" at 287.147,51.673 h1.14
  text "REFER PATTERN MASTER LIST" at 314.198,51.673 h1.14
  text "LEGEND / SCREEN PRINT:" at 281.94,48.752 h1.27
  text "NONE" at 314.198,48.625 h1.14
  text "COMPONENT" at 326.517,48.625 h1.14
  text "SOLDER" at 340.487,48.625 h1.14
  text "X" at 323.977,48.498 h1.52
  text "X" at 337.947,48.498 h1.52
  text "COLOUR:" at 272.161,45.704 h1.27
  text "WHITE" at 287.147,45.577 h1.14
  text "YELLOW" at 314.198,45.577 h1.14
  text "OTHER" at 340.487,45.577 h1.14
  text "X" at 284.607,45.45 h1.52
  text "X" at 284.607,42.529 h1.52
  text "LIQUID PHOTOIMAGEABLE" at 287.147,42.529 h1.14
  text "SCREEN PRINT" at 326.517,42.529 h1.14
  text "MATTE" at 287.147,39.481 h1.14
  text "GLOSS" at 299.847,39.481 h1.14
  text "GREEN" at 314.198,39.481 h1.14
  text "BLUE" at 326.517,39.481 h1.14
  text "G/Y" at 340.487,39.481 h1.14
  text "OTHER" at 351.917,39.481 h1.14
  text "X" at 297.18,39.354 h1.52
  text "SOLDER MASK COLOUR:" at 261.62,36.56 h1.14
  text "BLACK" at 287.147,36.433 h1.14
  text "GREEN" at 299.847,36.433 h1.14
  text "YELLOW" at 314.198,36.433 h1.14
  text "BLUE" at 326.517,36.433 h1.14
  text "OTHER" at 340.487,36.433 h1.14
  text "X" at 284.48,36.306 h1.52
  text "TRACK FINISH:" at 261.62,33.512 h1.52
  text "X" at 284.607,33.385 h1.52
  text "SELECTIVE SOLDER (HASL)" at 287.147,33.385 h1.14
  text "REFLOW SOLDER" at 326.517,33.385 h1.14
  text "SELECTIVE GOLD" at 287.147,30.337 h1.14
  text "um  (AREA" at 314.198,30.337 h1.14
  text "sq. mm)" at 342.011,30.337 h1.14
  text "REFER PATTERN MASTER LIST" at 287.147,27.289 h1.14
  text "OTHER" at 326.517,27.289 h1.14
  text "EDGE BOARD" at 261.62,24.368 h1.52
  text "1.3um HARD GOLD OVER 5um     NICKEL / TIN-NICKEL" at 287.147,24.241 h1.14
  text "CONTACTS:" at 261.62,22.209 h1.52
  text "HARD FINISH GOLDE PLATE" at 287.147,21.193 h1.14
  text "OTHER" at 326.517,21.193 h1.14
  text "AS SHOWN" at 287.147,18.145 h1.14
  text "REFER" at 326.517,18.145 h1.14
  text "PROFILING:" at 261.62,15.097 h1.52
  text "AS DIMENSIONED, MEASURED AND CUT FROM SPECIFIED DATUM." at 287.147,15.097 h1.14
  text "X" at 284.607,14.97 h1.52
  text "REFER PCB BLANK DWG No." at 287.274,12.176 h1.27
  text "USE PROFILE / ROUTE TAPE SUPPLIED (REFER PATTERN MASTER LIST)" at 287.274,9.128 h1.27
  text "SQUARE CUT" at 287.274,6.08 h1.27
  text "N.C. ROUTE" at 305.054,6.08 h1.27
  text "V. SCORE" at 322.834,6.08 h1.27
  text "BLANK" at 340.614,6.08 h1.27
  text "ACCEPTABILITY:" at 261.62,3.413 h1.52
  text "MATERIALS AND WORKMANSHIP FOR ALL PRINTED WIRING BOARDS TO MEET" at 283.845,3.286 h1.27
  text "OR EXCEED THE REQUIREMENTS OF:" at 283.845,0.492 h1.27
  text "IPC-6011/12 AND IPC-A-600E" at 287.401,-2.175 h1.27
  text "1" at 322.961,-2.175 h1.27
  text "2" at 331.851,-2.175 h1.27
  text "X" at 329.184,-2.302 h1.52
  text "X" at 284.734,-2.429 h1.52
  text "3" at 340.741,-4.334 h1.27
  text "UL CERTIFICATION" at 287.401,-5.223 h1.27
  text "AUSTEL" at 322.961,-5.223 h1.27
  text "X" at 284.734,-5.35 h1.52
  text "ML-P-55110F GRP" at 286.893,-8.271 h1.02
  text "A" at 305.181,-8.271 h1.27
  text "B" at 314.071,-8.271 h1.27
  text "AS2546" at 322.961,-8.271 h1.27
  text "OTHER" at 340.741,-8.271 h1.27
  text "ADDITIONAL" at 261.62,-11.192 h1.52
  text "NONE" at 287.401,-11.446 h1.27
  text "SAMPLE PLAN" at 305.181,-11.446 h1.27
  text "MIL-P-55110E SERIAL Nos. PER ORDER" at 322.961,-11.446 h1.27
  text "REQUIREMENTS:" at 261.62,-13.605 h1.52
  text "NONE" at 287.401,-14.494 h1.27
  text "ML-P-55110F GRP" at 304.673,-14.494 h1.02
  text "A" at 322.961,-14.494 h1.27
  text "B" at 331.851,-14.494 h1.27
  text "IPC CLASS:" at 337.82,-14.494 h1.27
  text "1" at 353.314,-14.494 h1.27
  text "2" at 359.664,-14.494 h1.27
  text "3" at 366.014,-14.494 h1.27
  text "QUALITY RELEASE REPORT" at 305.181,-17.542 h1.27
  text "OTHER" at 345.694,-17.542 h1.27
  text "PER ORDER" at 354.203,-17.669 h1.27
  text "X" at 343.027,-17.796 h1.52
  text "NONE" at 305.181,-20.59 h1.27
  text "REQUIRED" at 322.961,-20.59 h1.27
  text "PER ORDER" at 345.821,-20.59 h1.27
  text "ELECTRICAL TEST:" at 261.62,-20.717 h1.52
  text "X" at 320.294,-20.717 h1.52
  text "NONE" at 305.181,-23.638 h1.27
  text "1 SIDE" at 322.834,-23.638 h1.14
  text "2 SIDES" at 334.01,-23.638 h1.14
  text "MIN. PITCH" at 345.694,-23.638 h1.27
  text "0.50mm" at 359.283,-23.638 h1.27
  text "SURFACE MOUNT:" at 261.62,-23.765 h1.52
  text "X" at 331.775,-23.841 h1.52
  text "NONE" at 305.181,-26.686 h1.27
  text "FOIL" at 322.961,-26.686 h1.27
  text "LEGEND" at 334.391,-26.686 h1.27
  text "REFER" at 345.694,-26.686 h1.27
  text "MANUFACTURER'S ID/LOGO:" at 261.62,-26.813 h1.52
  text "ISO9001/AS3901" at 308.991,-29.734 h1.27
  text "NONE" at 345.694,-29.734 h1.27
  text "MANUFACTURER'S ACCREDITATION:" at 261.62,-29.861 h1.52
  text "X" at 306.324,-29.861 h1.52
  text "PER ORDER" at 305.181,-32.782 h1.27
  text "REFER" at 322.961,-32.782 h1.27
  text "PACKAGING AND HANDLING:" at 261.62,-32.909 h1.52
  text "X" at 302.514,-33.036 h1.52
Sheet:
  drawing of 1882 lines, arcs and shapes, not listed
  text "1" at 3.717,207.391 h1.78
  text "2" at 52.756,207.391 h1.78
  text "3" at 102.015,207.391 h1.78
  text "4" at 151.308,207.391 h1.78
  text "5" at 200.584,207.391 h1.78
  text "6" at 249.606,207.391 h1.78
  text "7" at 299.136,207.391 h1.78
  text "8" at 348.158,207.391 h1.78
  text "A" at -18.415,173.406 h1.78
  text "A" at 370.205,173.406 h1.78
  text "B" at -18.415,102.794 h1.78
  text "B" at 370.205,102.794 h1.78
  text "C" at -18.415,32.182 h1.78
  text "C" at 370.205,32.182 h1.78
  text "D" at -18.415,-37.922 h1.78
  text "D" at 370.205,-37.922 h1.78
  text "ENGINEER:" at 255.27,-38.1 h1.14
  text "TITLE:" at 293.37,-38.1 h1.14
  text "PCB DESIGNER:" at 255.27,-45.593 h1.14
  text "DATE:" at 255.27,-53.34 h1.14
  text "PART NO.:" at 293.37,-53.34 h1.14
  text "REV:" at 346.71,-53.34 h1.14
  text "Altium Limited" at 222.25,-55.88 h1.78
  text ".PRINT_DATE" at 256.54,-56.388 h1.78
  text "12a Rodborough Rd" at 222.25,-58.42 h1.78
  text "Frenchs Forest" at 222.25,-60.96 h1.78
  text "FILE NAME:" at 255.27,-60.96 h1.14
  text "DWG NO:" at 293.37,-60.96 h1.14
  text "SCALE:" at 346.71,-60.96 h1.14
  text "NSW 2086" at 222.25,-63.5 h1.78
  text ".PCB_FILE_NAME_NO_PATH" at 256.54,-64.008 h1.78
  text "1" at 3.717,-69.469 h1.78
  text "2" at 52.756,-69.469 h1.78
  text "3" at 102.015,-69.469 h1.78
  text "4" at 151.308,-69.469 h1.78
  text "5" at 200.584,-69.469 h1.78
  text "6" at 249.606,-69.469 h1.78
  text "7" at 299.136,-69.469 h1.78
  text "8" at 348.158,-69.469 h1.78
Drill Drawing:
  text ".Legend" at 0,-8 h0.75

## Dimensions
0,0 to 69,0 on Dimensions
0,0 to 0.001,77 on Dimensions
34.5,-69.801 to 34.5,84 on Dimensions